# Altium PCB PCB.PcbDoc
Units mm, origin at the board's own origin, x right, y up, seen from the top; angles counter-clockwise.
Board outline 44.5 x 25.75 mm, 2 copper layers (Top Layer, Bottom Layer); 25 components, 19 nets, 79 pads, 10 vias.
Unrouted connection lines stored in the file: 2.
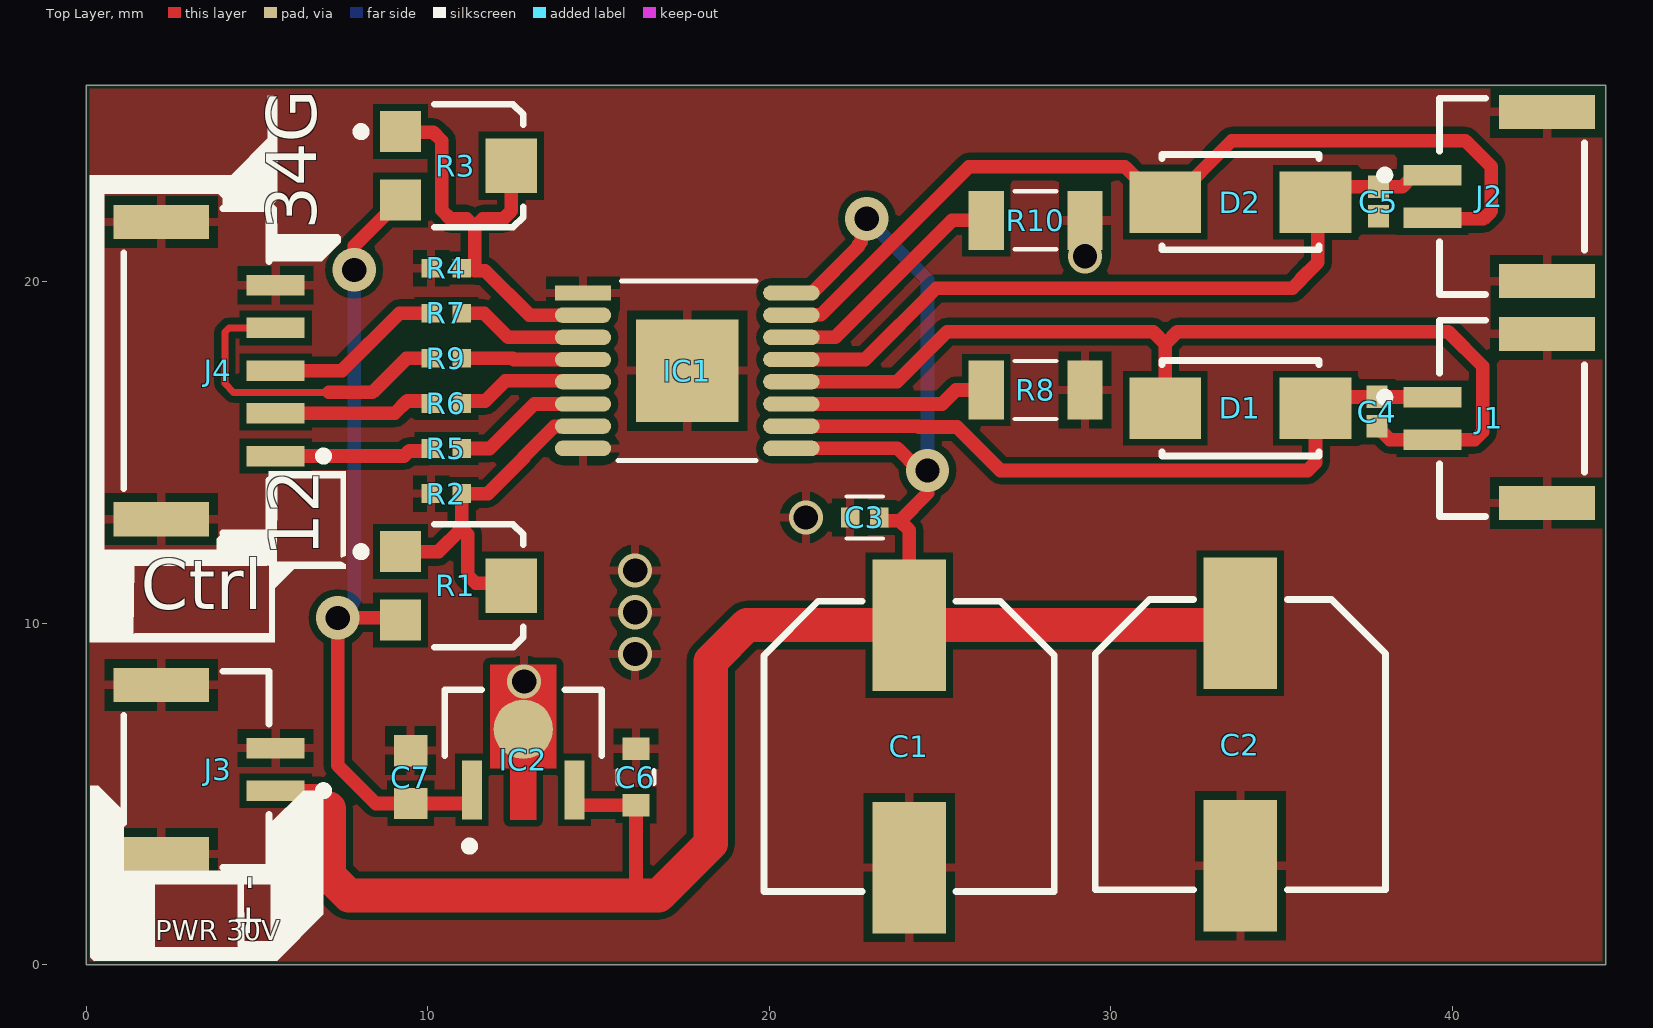
[diagram p0: Top Layer view]
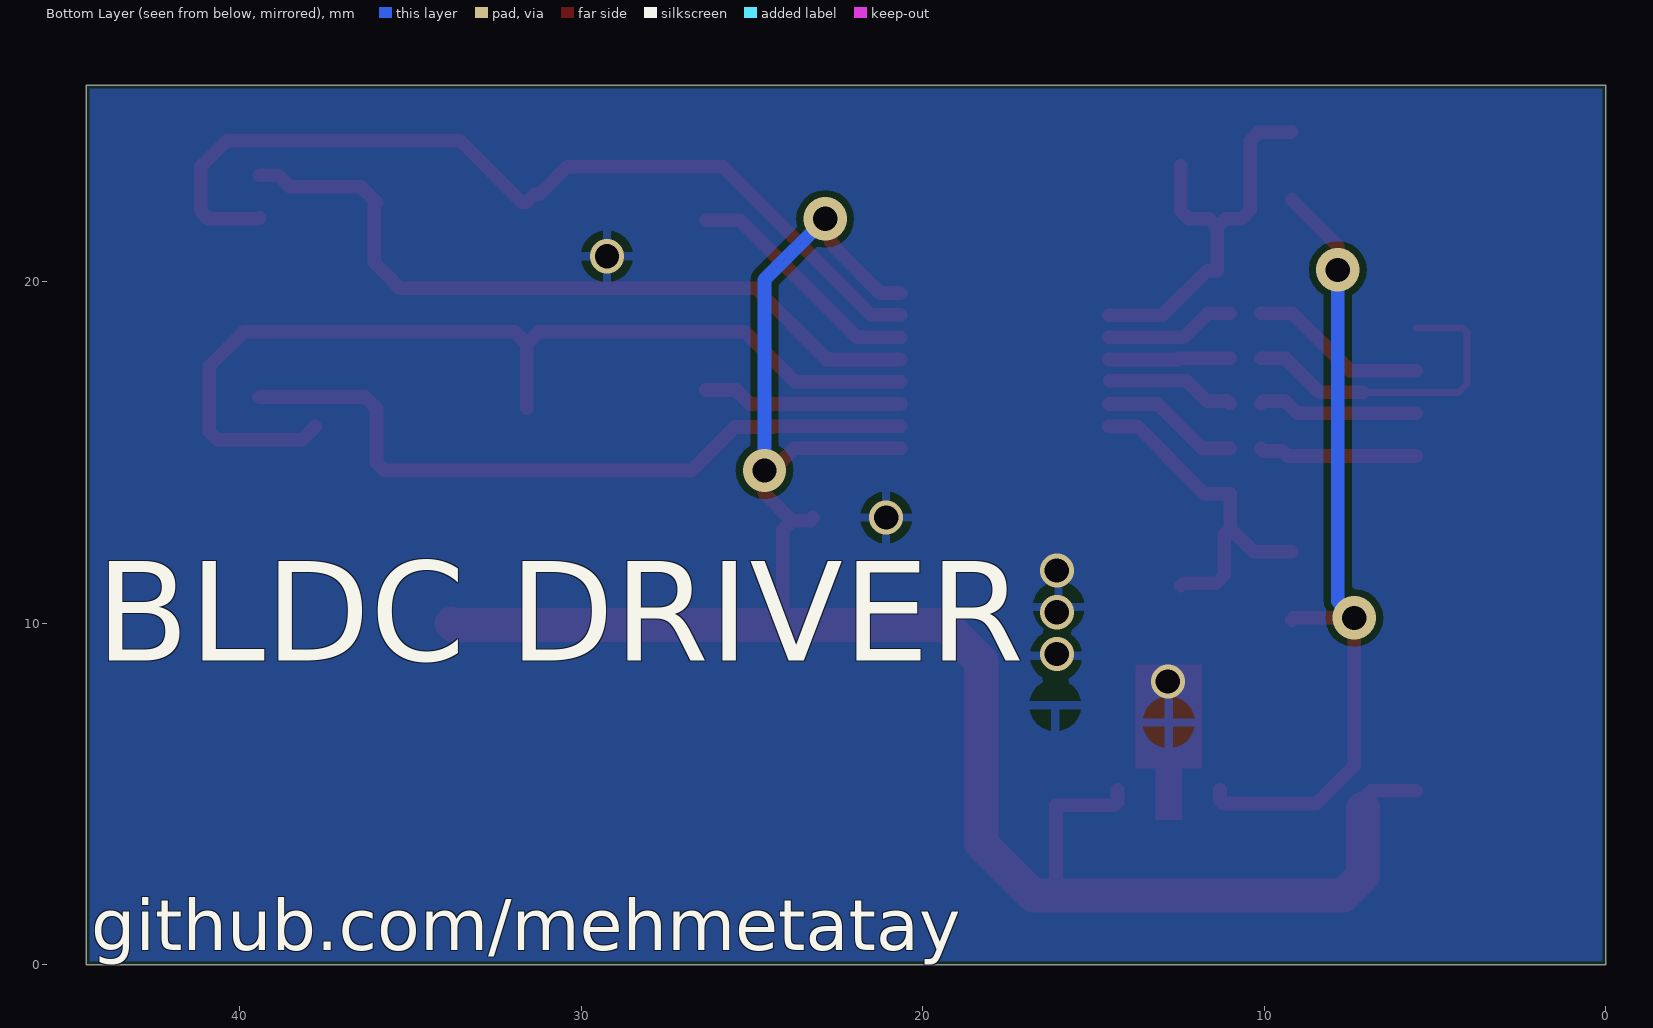
[diagram p1: Bottom Layer view, seen from below]
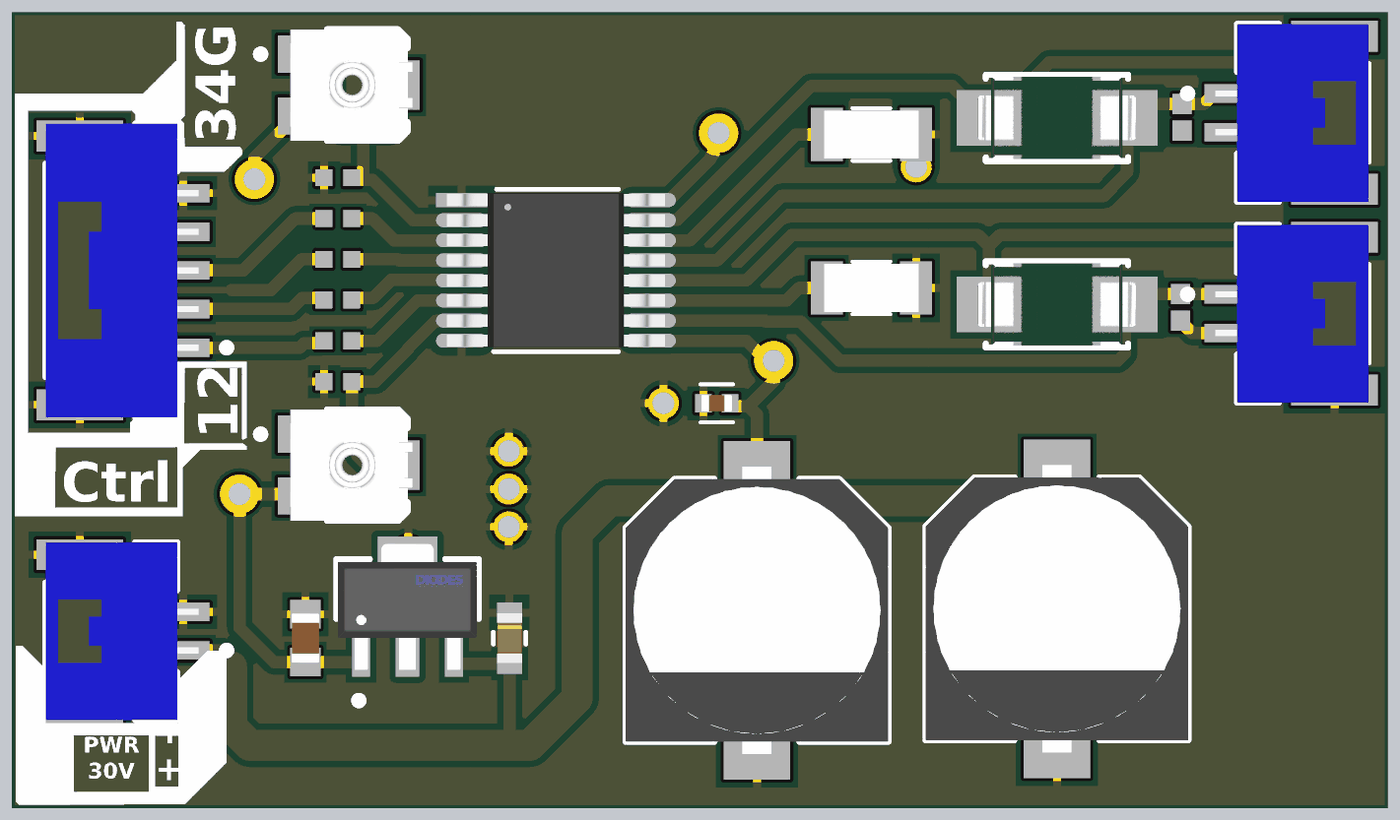
[diagram p2: 3D render of the assembled board from above, using the file's embedded part models]

## Layer stack, top to bottom
Top Solder: solder mask 0.0102, Solder Resist, Dk 3.5
Top Layer: signal copper 0.0356
Dielectric 1: dielectric 0.32, FR-4, Dk 4.8
Bottom Layer: signal copper 0.0356
Bottom Solder: solder mask 0.0102, Solder Resist, Dk 3.5

## Board outline
0,0 44.5,0 44.5,25.75 0,25.75

## Design rules (kind name [scope] priority, off if disabled: settings)
Clearance [All] p1: gap=0.2 ignorepadtopadclearanceinfootprint=FALSE except(0: Arc-Text Track-Text SMDPad-Text THPad-Text Via-Text Fill-Text Poly-Text Region-Text Text-Text Text-Hole)
MinimumSolderMaskSliver [All] p1: minsoldermaskwidth=0
PolygonConnect [All] p1: connectstyle=Relief reliefconductorwidth=0.254 reliefentries=4 polygonreliefangle="90 Angle" airgapwidth=0.254
RoutingVias [All] p1: holewidth=0.711 width=1.27 viastyle="Through Hole" minholewidth=0.711 minwidth=1.27 maxholewidth=0.711 maxwidth=1.27
SilkToSilkClearance [All] p1: silktosilkclearance=0
SilkToSolderMaskClearance [IsPad] p1: minsilkscreentomaskgap=0 clearancetoexposedcopper=TRUE
SolderMaskExpansion [All] p1: expansion=0.102 istentingtop=FALSE
Width [All] p1: maxlimit=2 minlimit=0.2 preferedwidth=0.4
27 further rules are at their usual default settings.

## Components (designator, comment, footprint, x,y, rotation, side; value= is the part's Value field where it differs from the comment)
C1 "100uF" NIC-UWT1H101MNL1GS_N 24.1,6.4 r270 top
C2 "100uF" NIC-UWT1H101MNL1GS_N 33.8,6.45 r270 top
C3 "220nF" CAPC1005X55N 22.8,13.1 r0 top
C4 "100nF" CAPC1005X60X30NL05T10 37.8,16.2 r90 top
C5 "100nF" CAPC1005X60X30NL05T10 37.846,22.352 r270 top
C6 "1uF" CAP_CL10_SAM 16.1,5.5 r270 top
C7 "2.2uF" CAPC1608X90N 9.5,5.5 r270 top
D1 "TVS Diode" FP-SMAJ-CA-MFG 33.8,16.3 r180 top
D2 "TVS Diode" FP-SMAJ-CA-MFG 33.8,22.333 r180 top
IC1 "Allegro A4954" TSSOP-16_ALM 17.6,17.4 r0 top
IC2 "3.3V Linear Reg" FP-SOT89-MFG 12.8,6.754 r0 top
J1 "2 Pin Header" JST-BM02B-GHS-TBT_V 41.1,16 r270 top
J2 "2 Pin Header" JST-BM02B-GHS-TBT_V 41.1,22.5 r270 top
J3 "2 Pin Header" JST-BM02B-GHS-TBT_V 3.875,5.725 r90 top
J4 "5 Pin Header" JST-BM05B-GHS-TBT_V 3.875,17.4 r90 top
R1 "10kR" BOUR-TC33X-2_V 11,11.1 r0 top
R2 "750R" RESC1005X40X25NL05T05 10.55,13.8 r0 top
R3 "10kR" BOUR-TC33X-2_V 11,23.4 r0 top
R4 "750R" RESC1005X40X25NL05T05 10.55,20.4 r0 top
R5 "33R" RESC1005X40X25NL05T05 10.55,15.12 r0 top
R6 "33R" RESC1005X40X25NL05T05 10.55,16.44 r0 top
R7 "33R" RESC1005X40X25NL05T05 10.55,19.08 r0 top
R8 "250mR" RESC3015X65N 27.8,16.833 r0 top
R9 "33R" RESC1005X40X25NL05T05 10.55,17.76 r0 top
R10 "250mR" RESC3015X65N 27.8,21.8 r0 top

## Footprints (in the part's own frame and the unit in brackets; to place one, negate y for a bottom-side part, rotate by r counter-clockwise, add the part's x,y. Pads: shape width x height; smd on the part's side, far side on the other; paste and mask are expansions set on the pad)
BOUR-TC33X-2_V [mm] "SMD, 3-Leads, Body 3.8x3.6mm"
  rect 1.2x1.2 smd: 1(-1.8,1) 3(-1.8,-1)
  rect 1.5x1.6 smd: 2(1.45,0)
  silkscreen extent -3.07,-1.8 1.8,1.8, body extent -2,-1.8 1.96,1.8, height 1.15
CAP_CL10_SAM [mm]
  rect 0.656x0.8 smd paste+0 mask+0: 1(-0.828,0) 2(0.828,0)
  silkscreen extent -0.19,-0.53 0.19,0.53, body extent -0.8,-0.4 0.8,0.4, height 0.9
CAPC1005X55N [mm]
  rect 0.54x0.6 smd: 1(-0.43,0) 2(0.43,0)
  silkscreen extent -0.53,-0.62 0.53,0.62, body extent -0.5,-0.27 0.5,0.28, height 0.48
CAPC1005X60X30NL05T10 [mm] "Chip Capacitor, 2-Leads, Body 1.00x0.50mm, IPC Medium Density"
  rect 0.66x0.62 smd: 1(-0.43,0) 2(0.43,0)
  body extent -0.53,-0.28 0.53,0.27, height 0.6
CAPC1608X90N [mm]
  rect 0.92x0.98 smd: 1(-0.775,0) 2(0.775,0)
  body extent -0.8,-0.45 0.8,0.45, height 0.78
FP-SMAJ-CA-MFG [mm]
  rect 2.1x1.8 smd paste+0 mask+0: 1(-2.2,0) 2(2.2,0)
  silkscreen extent -2.3,-1.4 2.3,1.4, body extent -3.35,-1.5 3.35,1.5, height 0.25
FP-SOT89-MFG [mm]
  rect 0.58x1.73 smd paste+0 mask+0: 1(-1.5,-1.635) 3(1.5,-1.635)
  round 1.74 smd paste+0 mask+0: 2(0,0.146)
  Top Layer region: -0.38,-2.5 -0.38,-1 -0.967,-1 -0.967,2.03 0.967,2.03 0.967,-1 0.38,-1 0.38,-2.5
  silkscreen extent -2.3,-3.4 2.3,1.3, body extent -2.4,-2.6 2.4,2.13, height 0.25
JST-BM02B-GHS-TBT_V [mm] "Connector, 2-Leads, Body 5.75x4.25mm, Pitch 1.25mm"
  rect 0.6x1.7 smd: 1(-0.625,-1.675) 2(0.625,-1.675)
  rect 1x2.8 smd: MP1(-2.475,1.675) MP2(2.475,1.675)
  silkscreen extent -2.88,-3.2 2.88,2.78, body extent -2.88,-2.17 2.87,2.78, height 4.21
JST-BM05B-GHS-TBT_V [mm] "Connector, 5-Leads, Body 9.5x4.25mm, Pitch 1.25mm"
  rect 0.6x1.7 smd: 1(-2.5,-1.675) 2(-1.25,-1.675) 3(0,-1.675) 4(1.25,-1.675) 5(2.5,-1.675)
  rect 1x2.8 smd: MP1(-4.35,1.675) MP2(4.35,1.675)
  silkscreen extent -4.75,-3.2 4.75,2.78, body extent -4.75,-2.17 4.75,2.78, height 4.2
NIC-UWT1H101MNL1GS_N [mm] "Aluminum Electrolytic Capacitor, Body 8.5x8.5mm, IPC Medium Density"
  rect 3.85x2.15 smd: 1(-3.55,0) 2(3.55,0)
  silkscreen extent -4.25,-4.25 4.25,4.25, body extent -4.65,-4.25 4.65,4.25, height 10.8
RESC1005X40X25NL05T05 [mm] "Chip Resistor, 2-Leads, Body 1.00x0.50mm, IPC Medium Density"
  rect 0.55x0.55 smd: 1(-0.45,0) 2(0.45,0)
  body extent -0.53,-0.27 0.53,0.28, height 0.4
RESC3015X65N [mm]
  rect 1.03x1.72 smd: 1(-1.445,0) 2(1.445,0)
  silkscreen extent -0.61,-0.85 0.61,0.85, body extent -1.53,-0.77 1.53,0.77, height 0.65
TSSOP-16_ALM [mm]
  rect 1.65x0.45 smd paste+0 mask+0: 1(-3.05,2.275)
  oval 1.65x0.45 smd paste+0 mask+0: 2(-3.05,1.625) 3(-3.05,0.975) 4(-3.05,0.325) 5(-3.05,-0.325) 6(-3.05,-0.975) 7(-3.05,-1.625) 8(-3.05,-2.275) 9(3.05,-2.275) 10(3.05,-1.625) 11(3.05,-0.975) 12(3.05,-0.325) 13(3.05,0.325) 14(3.05,0.975) 15(3.05,1.625) 16(3.05,2.275)
  rect 3x3 smd paste-1.487 mask+0: 17(0,0)
  silkscreen extent -2.02,-2.63 2.02,2.63, body extent -3.52,-2.5 3.53,2.5, height 1.2

## Part data
C1 C2: "100uF 50 V dc Aluminium Electrolytic Capacitor; WT Series 1000h 8 (Dia.) x 10mm", Case/Package=Radial, Dielectric Material=Aluminium, Leakage Current=3uA, Manufacturer=Nichicon, Manufacturer Part Number=UWT1H101MNL1GS, Max Operating Temperature=105°C, Min Operating Temperature=-55°C, Package Quantity=500, Ripple Current=140mA, Supplier Part Number 1=493-2226-1-ND, Tolerance=20%, Voltage=50V, Capacitance=100uF, Category="Aluminum Electrolytic Capacitors", ComponentLink1Description=https://datasheet.ciiva.com/97/e-wt-97104.pdf?src-supplier=Digi-Key, ComponentLink1URL=https://datasheet.ciiva.com/97/e-wt-97104.pdf?src-supplier=Digi-Key, ComponentLink2Description=https://datasheet.ciiva.com/97/e-wt-97105.pdf?src-supplier=Digi-Key, ComponentLink2URL=https://datasheet.ciiva.com/97/e-wt-97105.pdf?src-supplier=Digi-Key, ComponentLink3Description=https://datasheet.ciiva.com/97/e-wt-97106.pdf?src-supplier=Digi-Key, ComponentLink3URL=https://datasheet.ciiva.com/97/e-wt-97106.pdf?src-supplier=Digi-Key, ComponentLink4Description=https://datasheet.ciiva.com/11776/0900766b80fa3a91-11776930.pdf?src-supplier=RSComponents, ComponentLink4URL=https://datasheet.ciiva.com/11776/0900766b80fa3a91-11776930.pdf?src-supplier=RSComponents, ComponentLink5Description=https://datasheet.ciiva.com/5362/e-wt-30307-5362773.pdf?src-supplier=Mouser, ComponentLink5URL=https://datasheet.ciiva.com/5362/e-wt-30307-5362773.pdf?src-supplier=Mouser, ComponentLink6Description=https://datasheet.ciiva.com/11686/e-wt-11686889.pdf?src-supplier=Avnet, ComponentLink6URL=https://datasheet.ciiva.com/11686/e-wt-11686889.pdf?src-supplier=Avnet, ComponentLink7Description=https://datasheet.ciiva.com/28458/1910938-28458459.pdf?src-supplier=Element14, ComponentLink7URL=https://datasheet.ciiva.com/28458/1910938-28458459.pdf?src-supplier=Element14, ComponentLink8Description=https://datasheet.ciiva.com/16502/e-wt-16502940.pdf?src-supplier=Future+Electronics, ComponentLink8URL=https://datasheet.ciiva.com/16502/e-wt-16502940.pdf?src-supplier=Future+Electronics, ComponentLink9Description=https://datasheet.ciiva.com/7781/e-wt-7781807.pdf?src-supplier=Element14, ComponentLink9URL=https://datasheet.ciiva.com/7781/e-wt-7781807.pdf?src-supplier=Element14, ComponentLink10Description=https://datasheet.ciiva.com/17527/e-wt-17527183.pdf?src-supplier=Avnet+Europe, ComponentLink10URL=https://datasheet.ciiva.com/17527/e-wt-17527183.pdf?src-supplier=Avnet+Europe, Diameter=8mm, Dissipation Factor=0.14%, Height=10mm, Height - Seated (Max)=0.413inch, Lead Free="Lead Free", Length=10mm, Life (Hours)=1000Hour, Mount="Surface Mount", Number of Pins=2, Packaging="Tape and Reel", Pricing 1="1=0,44000, 10=0,31400, 50=0,23720, 100=0,20660 (USD)", Radiation Hardening=No, REACH SVHC="No SVHC", Ripple Current (AC)=140mA, RoHS=Yes, Stock 1=103638, Supplier 1=Digi-Key, Termination=SMD/SMT, Voltage Rating=50V, Voltage Rating (DC)=50V
C3: "TAIYO YUDEN - UMK105BJ224KV-F - CAPACITOR, MLCC, X5R, 0.22UF, 50V, 0402, FULL REEL", Case Code (Metric)=1005, Case Code (Imperial)=0402, Dielectric=X5R, Manufacturer="Taiyo Yuden", Manufacturer Part Number=UMK105BJ224KV-F, Max Operating Temperature=85°C, Min Operating Temperature=-55°C, Package Quantity=10000, Supplier Part Number 1=587-3500-1-ND, Tolerance=10%, Voltage Rating=50V, Capacitance=220nF, Case/Package=0402, Category="Ceramic Capacitors", ComponentLink1Description=https://datasheet.ciiva.com/30112/713umk105bj224kv-f-30112478.pdf?src-supplier=Onlinecomponents.com, ComponentLink1URL=https://datasheet.ciiva.com/30112/713umk105bj224kv-f-30112478.pdf?src-supplier=Onlinecomponents.com, ComponentLink2Description=https://datasheet.ciiva.com/24495/460umk105bj224kv-f-24495779.pdf?src-supplier=Onlinecomponents.com, ComponentLink2URL=https://datasheet.ciiva.com/24495/460umk105bj224kv-f-24495779.pdf?src-supplier=Onlinecomponents.com, ComponentLink3Description=https://datasheet.ciiva.com/18697/mlcc-all-e-18697509.pdf?src-supplier=Digi-Key, ComponentLink3URL=https://datasheet.ciiva.com/18697/mlcc-all-e-18697509.pdf?src-supplier=Digi-Key, Halogen Free="Halogen Free", Height=0.5mm, Lead Free="Lead Free", Length=0.039inch, Mount="Surface Mount", Packaging="Tape and Reel", Pricing 1="1=0,21000, 10=0,14400, 50=0,08660, 100=0,07320, 500=0,05006, 1000=0,04428, 2500=0,04235, 5000=0,03850 (USD)", RoHS=Yes, Stock 1=285982, Supplier 1=Digi-Key, Termination=SMD/SMT, Thickness=0.022inch, Voltage Rating (DC)=50V, Width=0.02inch
C4 C5: "Capacitor 100 nF 10 VDC 0402", Case Code (Metric)=1005, Case Code (Imperial)=0402, Dielectric=X5R, Dielectric Material=Ceramic, Manufacturer=KEMET, Manufacturer Part Number=C0402C104K8PACTU, Max Operating Temperature=85°C, Min Operating Temperature=-55°C, Package Quantity=1, Supplier Part Number 1=399-3027-1-ND, Tolerance=10%, Voltage=10V, Capacitance=100nF, Case/Package=0402, Category="Ceramic Capacitors", ComponentLink1Description=https://datasheet.ciiva.com/7747/1776086-7747440.pdf?src-supplier=Element14, ComponentLink1URL=https://datasheet.ciiva.com/7747/1776086-7747440.pdf?src-supplier=Element14, ComponentLink2Description=https://datasheet.ciiva.com/144/docfinderpartnumber-c0402c104k8pactu-144097.pdf?src-supplier=Digi-Key, ComponentLink2URL=https://datasheet.ciiva.com/144/docfinderpartnumber-c0402c104k8pactu-144097.pdf?src-supplier=Digi-Key, ComponentLink3Description=https://datasheet.ciiva.com/14595/70095383-14595064.pdf?src-supplier=Allied+Electronics, ComponentLink3URL=https://datasheet.ciiva.com/14595/70095383-14595064.pdf?src-supplier=Allied+Electronics, ComponentLink4Description=https://datasheet.ciiva.com/14588/70095383-14588187.pdf?src-supplier=Allied+Electronics, ComponentLink4URL=https://datasheet.ciiva.com/14588/70095383-14588187.pdf?src-supplier=Allied+Electronics, ComponentLink5Description=https://datasheet.ciiva.com/28645/1789732-28645387.pdf?src-supplier=Element14, ComponentLink5URL=https://datasheet.ciiva.com/28645/1789732-28645387.pdf?src-supplier=Element14, Contact Plating=Tin,Matte, Depth=0.5mm, Dissipation Factor=5%, Height=0.5mm, Lead Free="Lead Free", Lead Pitch=0.3mm, Length=1mm, Mount="Surface Mount,PCB", Number of Pins=2, Packaging="Tape and Reel", Pricing 1="1=0,10000, 10=0,04000, 50=0,02180, 100=0,01780, 500=0,01270, 1000=0,00998, 2500=0,00908, 5000=0,00835 (USD)", Radiation Hardening=No, REACH SVHC="No SVHC", RoHS=Yes, Stock 1=907324, Supplier 1=Digi-Key, Termination=SMD/SMT, Thickness=0.022inch, Voltage Rating=10V, Voltage Rating (DC)=10V, Width=0.02inch
C6: "Cap Ceramic 1uF 50V X5R 10% SMD 0603 85C Cardboard T/R", Case Code (Metric)=1608, Case Code (Imperial)=0603, Dielectric=X5R, Manufacturer=Samsung, Manufacturer Part Number=CL10A105KB8NNNC, Max Operating Temperature=85°C, Min Operating Temperature=-55°C, Package Quantity=1, Supplier Part Number 1=1276-1860-1-ND, Tolerance=10%, Voltage Rating=50V, Capacitance=1uF, Case/Package=0603, Category="Ceramic Capacitors", ComponentLink1Description=https://datasheet.ciiva.com/26877/getdatasheetpartid-753736-26877879.pdf?src-supplier=Verical, ComponentLink1URL=https://datasheet.ciiva.com/26877/getdatasheetpartid-753736-26877879.pdf?src-supplier=Verical, Contact Plating=Tin, Depth=0.8mm, Length=1.6mm, Mount="Surface Mount", Packaging="Tape and Reel", Pricing 1="1=0,15000, 10=0,10500, 50=0,05960, 100=0,04940, 500=0,03462, 1000=0,02866 (USD)", Radiation Hardening=No, RoHS=Yes, Stock 1=1724919, Supplier 1=Digi-Key, Termination=Wraparound, Thickness=0.035inch, Width=0.031inch
C7: "SAMSUNG ELECTRO-MECHANICS - CL10A225KP8NNNC - SMD Multilayer Ceramic Capacitor, 2.2 µF, 10 V, 0603 [1608 Metric], ± 10%, X5R, CL Series", Case Code (Metric)=1608, Case Code (Imperial)=0603, Dielectric=X5R, Manufacturer=Samsung, Manufacturer Part Number=CL10A225KP8NNNC, Max Operating Temperature=85°C, Min Operating Temperature=-55°C, Package Quantity=1, Supplier Part Number 1=1276-1085-1-ND, Tolerance=10%, Voltage=10V, Capacitance=2.2uF, Case/Package=0603, Category="Ceramic Capacitors", ComponentLink1Description=https://datasheet.ciiva.com/25799/cl10a225kp8nnnc-25799697.pdf?src-supplier=Digi-Key, ComponentLink1URL=https://datasheet.ciiva.com/25799/cl10a225kp8nnnc-25799697.pdf?src-supplier=Digi-Key, ComponentLink2Description=https://datasheet.ciiva.com/26838/getdatasheetpartid-358617-26838359.pdf?src-supplier=Verical, ComponentLink2URL=https://datasheet.ciiva.com/26838/getdatasheetpartid-358617-26838359.pdf?src-supplier=Verical, ComponentLink3Description=https://datasheet.ciiva.com/29198/457945-da-01-en-vs-kondensator-0603-29198592.pdf?src-supplier=Conrad, ComponentLink3URL=https://datasheet.ciiva.com/29198/457945-da-01-en-vs-kondensator-0603-29198592.pdf?src-supplier=Conrad, Depth=0.8mm, Height=0.8mm, Lead Free="Lead Free", Length=1.6mm, Material=Ceramic, Mount="Surface Mount", Packaging="Tape and Reel", Pricing 1="1=0,10000, 10=0,05600, 50=0,03040, 100=0,02490, 500=0,01778, 1000=0,01398 (USD)", Radiation Hardening=No, RoHS=Yes, Stock 1=840059, Supplier 1=Digi-Key, Thickness=0.035inch, Voltage Rating=10V, Voltage Rating (DC)=10V, Width=0.031inch
D1 D2: "LITTELFUSE - SMAJ36CA - TVS Diode, SMAJ Series, Bidirectional, 36 V, 58.1 V, DO-214AC (SMA), 2 Pins", Breakdown Voltage=40V, Clamping Voltage=58.1V, Leakage Current=1uA, Manufacturer=Littelfuse, Manufacturer Part Number=SMAJ36CA, Max Breakdown Voltage=44.2V, Max Operating Temperature=150°C, Max Power Dissipation=3.3W, Max Surge Current=6.9A, Min Operating Temperature=-55°C, Operating Supply Voltage=36V, Package Quantity=5000, Peak Pulse Power=400W, Power Line Protection=No, Resistor Type=Zener, Supplier Part Number 1=SMAJ36CALFCT-ND, Test Current=1mA, Category="TVS Diodes", ComponentLink1Description=https://datasheet.ciiva.com/331/littelfuse-tvs-diode-smaj-datasheet-pdf-331060.pdf?src-supplier=Digi-Key, ComponentLink1URL=https://datasheet.ciiva.com/331/littelfuse-tvs-diode-smaj-datasheet-pdf-331060.pdf?src-supplier=Digi-Key, ComponentLink2Description=https://datasheet.ciiva.com/331/littelfuse-tvs-diode-smaj-datasheet-pdf-331061.pdf?src-supplier=Digi-Key, ComponentLink2URL=https://datasheet.ciiva.com/331/littelfuse-tvs-diode-smaj-datasheet-pdf-331061.pdf?src-supplier=Digi-Key, ComponentLink3Description=https://datasheet.ciiva.com/331/littelfuse-tvs-diode-smaj-datasheet-pdf-331062.pdf?src-supplier=Digi-Key, ComponentLink3URL=https://datasheet.ciiva.com/331/littelfuse-tvs-diode-smaj-datasheet-pdf-331062.pdf?src-supplier=Digi-Key, ComponentLink4Description=https://datasheet.ciiva.com/16487/littelfuse-tvs-diode-smaj-16487439.pdf?src-supplier=Future+Electronics, ComponentLink4URL=https://datasheet.ciiva.com/16487/littelfuse-tvs-diode-smaj-16487439.pdf?src-supplier=Future+Electronics, Direction=Bidirectional, Height=2.29mm, Lead Free="Lead Free", Length=5.28mm, Min Breakdown Voltage=40V, Mount="Surface Mount", Number of Bidirectional Channels=1, Number of Channels=1, Number of Elements=1, Number of Pins=2, Packaging="Tape and Reel", Peak Pulse Current=6.9A, Polarity=Bidirectional, Power Dissipation=400W, Pricing 1="1=0,41000, 10=0,27500, 100=0,15750, 500=0,11000, 1000=0,08750, 2000=0,08500 (USD)", REACH SVHC="No SVHC", Reverse Breakdown Voltage=40V, Reverse Standoff Voltage=36V, RoHS=Yes, Stock 1=7566, Supplier 1=Digi-Key, Termination=SMD/SMT, Voltage Rating (DC)=36V, Width=2.79mm
IC1: "IC MOTOR DRIVER PAR 16TSSOP", Case/Package=TSSOP, Manufacturer="Allegro MicroSystems", Manufacturer Part Number=A4954ELPTR-T, Max Operating Temperature=85°C, Max Supply Voltage=40V, Min Operating Temperature=-40°C, Min Supply Voltage=8V, Output Current=1.5A, Package Quantity=1, Supplier Part Number 1=620-1384-1-ND, Category="Motor Drivers", ComponentLink1Description=https://datasheet.ciiva.com/8199/a4954-datasheet-8199653.pdf?src-supplier=Avnet, ComponentLink1URL=https://datasheet.ciiva.com/8199/a4954-datasheet-8199653.pdf?src-supplier=Avnet, ComponentLink2Description=https://datasheet.ciiva.com/17233/a4954-datasheet-17233770.pdf?src-supplier=Avnet+Europe, ComponentLink2URL=https://datasheet.ciiva.com/17233/a4954-datasheet-17233770.pdf?src-supplier=Avnet+Europe, Lead Free="Lead Free", Mount="Surface Mount", Number Of Outputs=2, Packaging="Tape and Reel", Pricing 1="1=2,76000, 10=2,47500, 25=2,34000, 100=1,92400, 250=1,72640, 500=1,66400, 1000=1,38320 (USD)", RoHS=Yes, Stock 1=14132, Supplier 1=Digi-Key
IC2: "IC REG LINEAR 3.3V 150MA SOT89", Case/Package=SOT-89, Dropout Voltage=1V, Manufacturer=Diodes, Manufacturer Part Number=AP7381-33Y-13, Max Operating Temperature=125°C, Max Supply Current=25uA, Max Input Voltage=40V, Min Operating Temperature=-40°C, Min Output Voltage=3.3V, Output Current=150mA, Quiescent Current=2.5uA, Supplier Part Number 1=621-AP7381-33Y-13, Category="Voltage Regulators - Linear", ComponentLink1Description=https://www.diodes.com/assets/Datasheets/AP7381.pdf?src-supplier=Digi-Key, ComponentLink1URL=https://www.diodes.com/assets/Datasheets/AP7381.pdf?src-supplier=Digi-Key, Mount="Surface Mount", Number of Regulators=1, Output Configuration=Positive, Output Type=Fixed, Packaging="Tape and Reel", Pricing 1="1=0,44000, 10=0,29700, 100=0,14100, 1000=0,10800, 2500=0,09100, 10000=0,08300 (USD)", RoHS=No, Stock 1=86570, Supplier 1=Mouser
J1 J2 J3: "CONN HEADER SMD 2POS 1.25MM", Color=Natural, Manufacturer=JST, Manufacturer Part Number=BM02B-GHS-TBT(LF)(SN)(N), Supplier Part Number 1=455-1578-1-ND, Category=Connectors, ComponentLink1Description=http://www.jst-mfg.com/product/pdf/eng/eGH.pdf?src-supplier=Digi-Key, ComponentLink1URL=http://www.jst-mfg.com/product/pdf/eng/eGH.pdf?src-supplier=Digi-Key, Connector Type="Outer Shroud Contact", Contact Plating=Tin, Fastening Type=Ramp, Lead Free="Lead Free", Mount="Surface Mount", Number Of Positions=2, Number Of Rows=1, Packaging="Tape and Reel", Pitch=0.049inch, Pricing 1="1=0,39000, 10=0,36800, 100=0,25760, 500=0,22076, 1000=0,18397 (USD)", RoHS=Yes, Stock 1=188, Supplier 1=Digi-Key, Termination=Solder
R1 R3: "Res Trimmer 10K Ohm 25% 1/10W 1(Elec)/1(Mech)Turn (3 X 3.8mm) Foot Print SMD Embossed T/R", Color=Silver, Manufacturer=Bourns, Manufacturer Part Number=TC33X-2-103E, Max Operating Temperature=100°C, Max Power Dissipation=100mW, Min Operating Temperature=-40°C, Package Quantity=2500, Resistor Type=Cermet,Potentiometer, Supplier Part Number 1=TC33X-103ECT-ND, Temperature Coefficient=250ppm/°C, Tolerance=25%, Voltage Rating (DC)=50V, Category="Variable Resistors and Potentiometers", ComponentLink1Description=https://datasheet.ciiva.com/11830/0900766b802749b3-11830705.pdf?src-supplier=RSComponents, ComponentLink1URL=https://datasheet.ciiva.com/11830/0900766b802749b3-11830705.pdf?src-supplier=RSComponents, ComponentLink2Description=https://datasheet.ciiva.com/7953/1818686-7953349.pdf?src-supplier=Element14, ComponentLink2URL=https://datasheet.ciiva.com/7953/1818686-7953349.pdf?src-supplier=Element14, ComponentLink3Description=https://datasheet.ciiva.com/26944/getdatasheetpartid-183773-26944166.pdf?src-supplier=Verical, ComponentLink3URL=https://datasheet.ciiva.com/26944/getdatasheetpartid-183773-26944166.pdf?src-supplier=Verical, ComponentLink4Description=https://datasheet.ciiva.com/2155/tc33-2155962.pdf?src-supplier=Digi-Key, ComponentLink4URL=https://datasheet.ciiva.com/2155/tc33-2155962.pdf?src-supplier=Digi-Key, ComponentLink5Description=https://datasheet.ciiva.com/2155/tc33-2155963.pdf?src-supplier=Digi-Key, ComponentLink5URL=https://datasheet.ciiva.com/2155/tc33-2155963.pdf?src-supplier=Digi-Key, ComponentLink6Description=https://datasheet.ciiva.com/2155/tc33-2155964.pdf?src-supplier=Digi-Key, ComponentLink6URL=https://datasheet.ciiva.com/2155/tc33-2155964.pdf?src-supplier=Digi-Key, ComponentLink7Description=https://datasheet.ciiva.com/8089/tc33-8089484.pdf?src-supplier=Avnet, ComponentLink7URL=https://datasheet.ciiva.com/8089/tc33-8089484.pdf?src-supplier=Avnet, ComponentLink8Description=https://datasheet.ciiva.com/28659/1520225-28659212.pdf?src-supplier=Element14, ComponentLink8URL=https://datasheet.ciiva.com/28659/1520225-28659212.pdf?src-supplier=Element14, ComponentLink9Description=https://datasheet.ciiva.com/16802/tc33-16802397.pdf?src-supplier=Avnet+Europe, ComponentLink9URL=https://datasheet.ciiva.com/16802/tc33-16802397.pdf?src-supplier=Avnet+Europe, Contact Plating=Copper,Tin,Silver, Depth=3.8mm, Height=0.047inch, Lead Free="Lead Free", Length=3mm, Military Standard=Not, Mount="Surface Mount", Number of Turns=1, Packaging="Tape and Reel", Power Rating=100mW, Pricing 1="1=0,26000, 10=0,25200, 25=0,22760, 50=0,21700, 100=0,21000, 250=0,19600, 500=0,17850, 1000=0,16100 (USD)", Radiation Hardening=No, REACH SVHC="No SVHC", Resistance=10kR, RoHS=Yes, Stock 1=123264, Supplier 1=Digi-Key, Taper=Linear, Termination="Foot Print", Weight=29.4mg, Width=0.118inch
R2 R4: "PANASONIC - ERJ2RKF7500X - SMD Chip Resistor, 0402 [1005 Metric], 750 ohm, ERJ2RK Series, 50 V, Thick Film, 100 mW", Case Code (Metric)=1005, Case Code (Imperial)=0402, Manufacturer=Panasonic, Manufacturer Part Number=ERJ2RKF7500X, Max Operating Temperature=155°C, Max Power Dissipation=100mW, Min Operating Temperature=-55°C, Package Quantity=10000, Resistor Type="Thick Film", Supplier Part Number 1=P750LCT-ND, Temperature Coefficient=100ppm/°C, Tolerance=1%, Voltage Rating=50V, Case/Package=0402, Category="Chip SMD Resistors", ComponentLink1Description=https://datasheet.ciiva.com/9180/aoa0000ce2-9180085.pdf?src-supplier=Avnet, ComponentLink1URL=https://datasheet.ciiva.com/9180/aoa0000ce2-9180085.pdf?src-supplier=Avnet, ComponentLink2Description=https://datasheet.ciiva.com/28676/1678782-28676646.pdf?src-supplier=Element14, ComponentLink2URL=https://datasheet.ciiva.com/28676/1678782-28676646.pdf?src-supplier=Element14, ComponentLink3Description=https://datasheet.ciiva.com/28565/1678782-28565079.pdf?src-supplier=Element14, ComponentLink3URL=https://datasheet.ciiva.com/28565/1678782-28565079.pdf?src-supplier=Element14, ComponentLink4Description=https://datasheet.ciiva.com/30202/aoa0000ce2-30202551.pdf?src-supplier=Onlinecomponents.com, ComponentLink4URL=https://datasheet.ciiva.com/30202/aoa0000ce2-30202551.pdf?src-supplier=Onlinecomponents.com, Contact Plating=Tin, Depth=0.5mm, Features="Automotive AEC-Q200", Height=0.35mm, Lead Free="Lead Free", Length=1mm, Military Standard=Not, Mount="Surface Mount", Number of Terminations=2, Packaging="Tape and Reel", Power Rating=100mW, Pricing 1="1=0,10000, 10=0,02200, 100=0,00890, 1000=0,00398, 2500=0,00345, 5000=0,00285 (USD)", REACH SVHC="No SVHC", Resistance=750R, RoHS=Yes, Stock 1=397750, Supplier 1=Digi-Key, Termination=SMD/SMT, Voltage Rating (DC)=50V, Width=0.02inch
R5 R6 R7 R9: "GLOVE, POLYAMIDE, L/FREE, PU, SIZE 6 - More Details", Case Code (Metric)=1005, Case Code (Imperial)=0402, Manufacturer=Panasonic, Manufacturer Part Number=ERJ-2GEJ330X, Max Operating Temperature=155°C, Max Power Dissipation=100mW, Min Operating Temperature=-55°C, Package Quantity=1, Resistor Type="Thick Film", Supplier Part Number 1=P33JCT-ND, Temperature Coefficient=200ppm/°C, Tolerance=5%, Voltage Rating=50V, Case/Package=0402, Category="Chip SMD Resistors", ComponentLink1Description=https://datasheet.ciiva.com/39121/1986916-39121637.pdf?src-supplier=Jameco, ComponentLink1URL=https://datasheet.ciiva.com/39121/1986916-39121637.pdf?src-supplier=Jameco, ComponentLink2Description=https://datasheet.ciiva.com/11821/0900766b80f806dd-11821291.pdf?src-supplier=RSComponents, ComponentLink2URL=https://datasheet.ciiva.com/11821/0900766b80f806dd-11821291.pdf?src-supplier=RSComponents, ComponentLink3Description=https://datasheet.ciiva.com/43460/1500035-43460357.pdf?src-supplier=Farnell, ComponentLink3URL=https://datasheet.ciiva.com/43460/1500035-43460357.pdf?src-supplier=Farnell, ComponentLink4Description=https://datasheet.ciiva.com/46374/1500035-46374021.pdf?src-supplier=Element14, ComponentLink4URL=https://datasheet.ciiva.com/46374/1500035-46374021.pdf?src-supplier=Element14, ComponentLink5Description=https://datasheet.ciiva.com/16522/aoa0000ce1-16522983.pdf?src-supplier=Avnet+Asia, ComponentLink5URL=https://datasheet.ciiva.com/16522/aoa0000ce1-16522983.pdf?src-supplier=Avnet+Asia, ComponentLink6Description=https://datasheet.ciiva.com/9190/aoa0000ce1-9190504.pdf?src-supplier=Avnet, ComponentLink6URL=https://datasheet.ciiva.com/9190/aoa0000ce1-9190504.pdf?src-supplier=Avnet, ComponentLink7Description=https://datasheet.ciiva.com/16784/70260739-16784442.pdf?src-supplier=Allied+Electronics, ComponentLink7URL=https://datasheet.ciiva.com/16784/70260739-16784442.pdf?src-supplier=Allied+Electronics, ComponentLink8Description=https://datasheet.ciiva.com/16449/aoa0000ce1-16449547.pdf?src-supplier=Future+Electronics, ComponentLink8URL=https://datasheet.ciiva.com/16449/aoa0000ce1-16449547.pdf?src-supplier=Future+Electronics, ComponentLink9Description=https://datasheet.ciiva.com/30205/4aoa0000ce1-30205131.pdf?src-supplier=Onlinecomponents.com, ComponentLink9URL=https://datasheet.ciiva.com/30205/4aoa0000ce1-30205131.pdf?src-supplier=Onlinecomponents.com, ComponentLink10Description=https://datasheet.ciiva.com/46386/1500035-46386748.pdf?src-supplier=Element14, ComponentLink10URL=https://datasheet.ciiva.com/46386/1500035-46386748.pdf?src-supplier=Element14, ComponentLink11Description=https://datasheet.ciiva.com/28547/1678796-28547165.pdf?src-supplier=Element14, ComponentLink11URL=https://datasheet.ciiva.com/28547/1678796-28547165.pdf?src-supplier=Element14, ComponentLink12Description=https://datasheet.ciiva.com/28686/1678796-28686909.pdf?src-supplier=Element14, ComponentLink12URL=https://datasheet.ciiva.com/28686/1678796-28686909.pdf?src-supplier=Element14, ComponentLink13Description=https://datasheet.ciiva.com/48530/aoa0000ce1-48530957.pdf?src-supplier=Avnet, ComponentLink13URL=https://datasheet.ciiva.com/48530/aoa0000ce1-48530957.pdf?src-supplier=Avnet, ComponentLink14Description=https://datasheet.ciiva.com/5917/1500035-5917807.pdf?src-supplier=Farnell, ComponentLink14URL=https://datasheet.ciiva.com/5917/1500035-5917807.pdf?src-supplier=Farnell, Contact Plating=Tin, Depth=0.5mm, Features="Automotive AEC-Q200", Height=0.35mm, Lead Free="Lead Free", Length=1mm, Military Standard=Not, Mount="Surface Mount", Number of Terminations=2, Packaging="Tape and Reel", Power Rating=100mW, Pricing 1="1=0,10000, 10=0,01900, 100=0,00770, 1000=0,00345, 2500=0,00299, 5000=0,00247 (USD)", Radiation Hardening=No, REACH SVHC="No SVHC", Resistance=33R, RoHS=Yes, Stock 1=1309957, Supplier 1=Digi-Key, Termination=SMD/SMT, Voltage Rating (DC)=50V, Width=0.02inch
R8 R10: "Res Thick Film 1206 250m Ohm 1% 1/2W 100ppm/C Molded SMD Paper T/R", Case Code (Metric)=3216, Case Code (Imperial)=1206, Manufacturer="Stackpole Electronics", Manufacturer Part Number=CSR1206FKR250, Max Operating Temperature=155°C, Max Power Dissipation=500mW, Min Operating Temperature=-55°C, Resistor Type="Thick Film", Supplier Part Number 1=CSR1206FKR250CT-ND, Temperature Coefficient=100ppm/°C, Tolerance=1%, Case/Package=1206, Category="Chip SMD Resistors", ComponentLink1Description=https://www.seielect.com/catalog/SEI-CSR_CSRN.pdf?src-supplier=Avnet+Asia, ComponentLink1URL=https://www.seielect.com/catalog/SEI-CSR_CSRN.pdf?src-supplier=Avnet+Asia, ComponentLink2Description=https://www.seielect.com/catalog/SEI-Packaging.pdf?src-supplier=Digi-Key, ComponentLink2URL=https://www.seielect.com/catalog/SEI-Packaging.pdf?src-supplier=Digi-Key, Contact Plating=Tin,Matte, Height=0.026inch, Lead Free="Lead Free", Length=0.12inch, Mount="Surface Mount", Number of Terminations=2, Packaging="Tape and Reel", Power Rating=500mW, Pricing 1="1=0,41000, 10=0,31100, 25=0,23640, 50=0,17560, 100=0,13050, 250=0,11024, 500=0,09450 (USD)", Resistance=250mR, RoHS=Yes, Stock 1=191422, Supplier 1=Digi-Key, Termination=Wraparound, Width=0.061inch

## Via types
v1: diameter 1, hole 0.711, Top Layer to Bottom Layer, 6 vias
v2: diameter 1.27, hole 0.711, Top Layer to Bottom Layer, 4 vias

## Nets (pads, with @x,y where several pads share a name; then routed paths per layer and width w, separated by ;. In a path a pad name is that pad's centre, name@x,y a point inside that pad or via, vN(x,y) a via of type N, cw(c..) or ccw(c..) an arc to the next point about the centre after c; other vN are vias at no path point)
3V3: C7.2 IC2.1 R1.3 R3.3 | length 23.9
  Top Layer w0.4: v2(7.85,20.35) 7.85,21.05 R3.3 ; R1.3 9.14,10.16 v2(7.366,10.16) 7.366,5.842 8.483,4.725 C7.2 11.21,4.725 11.3,4.815 IC2.1
  Bottom Layer w0.4: v2(7.366,10.16) 7.85,10.644 v2(7.85,20.35)
GND: C1.2 C2.2 C3.1 C6.1 C7.1 IC1.1 IC1.8 IC1.17 IC2.2 J1.MP1 J1.MP2 J2.MP1 J2.MP2 J3.2 J3.MP1 J3.MP2 J4.5 J4.MP1 J4.MP2 R2.1 R4.1 R8.2 R10.2
  other v1: 12.825,8.3 16.075,9.1 16.075,10.325 16.075,11.55 21.075,13.1 29.25,20.75
H1_IN1: J4.1 R5.1 | length 4.6
  Top Layer w0.4: J4.1 9.312,14.9 9.457,15.045 10.025,15.045 R5.1
H1_IN2: J4.2 R6.1 | length 4.7
  Top Layer w0.4: J4.2 9.038,16.15 9.398,16.51 10.03,16.51 R6.1
H1_IN3: J4.3 R7.1 | length 5.2
  Top Layer w0.4: J4.3 7.494,17.4 9.174,19.08 R7.1
H1_IN4: J4.4 R9.1 | length 9.6
  Top Layer w0.2: J4.4 4.181,18.65 4.064,18.533 4.064,17.018 4.318,16.764 7.112,16.764
  Top Layer w0.4: 7.112,16.764 8.382,16.764 9.378,17.76 R9.1
IN1: IC1.6 R5.2 | length 4.1
  Top Layer w0.4: R5.2 11.818,15.12 13.123,16.425 IC1.6
IN2: IC1.5 R6.2 | length 3.8
  Top Layer w0.4: R6.2 11.07,16.51 11.684,16.51 12.274,17.1 IC1.5@14.525,17.1
IN3: IC1.3 R7.2 | length 3.8
  Top Layer w0.4: R7.2 11.654,19.08 12.359,18.375 IC1.3
IN4: IC1.4 R9.2 | length 3.6
  Top Layer w0.4: R9.2 12.488,17.76 12.523,17.725 IC1.4
MOT_1A: C4.2 D1.1 IC1.10 J1.1 | length 21.1
  Top Layer w0.4: IC1.10 24.357,15.775 24.384,15.748 25.5,15.748 26.77,14.478 35.766,14.478 36,14.712 D1.1 36.33,16.63 C4.2 37.803,16.628 39.422,16.628 J1.1
MOT_1B: C4.1 D1.2 IC1.12 J1.2 | length 28.7
  Top Layer w0.4: IC1.12 23.746,17.075 25.213,18.542 31.242,18.542 31.6,18.184 ; D1.2 31.6,18.184 ; C4.1 37.8,15.75 38.175,15.375 J1.2 40.66,15.375 40.894,15.609 40.894,17.526 39.878,18.542 31.958,18.542 31.6,18.184
MOT_2A: C5.1 D2.1 IC1.13 J2.1 | length 22.2
  Top Layer w0.4: IC1.13 22.805,17.725 24.892,19.812 35.326,19.812 35.56,20.046 35.56,20.066 36.068,20.574 36.068,22.265 D2.1 36.449,22.782 C5.1 38.541,22.782 38.775,23.016 38.775,23.025 38.875,23.125 J2.1
MOT_2B: C5.2 D2.2 IC1.15 J2.2 | length 26.9
  Top Layer w0.4: IC1.15 20.66,19.035 21.514,19.035 25.848,23.368 30.415,23.368 31.216,22.568 31.366,22.568 D2.2 31.75,22.333 33.547,24.13 40.386,24.13 41.148,23.368 41.148,22.078 40.914,21.844 39.456,21.844 J2.2
NetR1_1: IC1.7 R1.1 R1.2 R2.2 | length 10.3
  Top Layer w0.4: R1.1 10.322,12.1 11,12.778 ; R1.2 12.374,11.176 11.41,11.176 11.176,11.41 11.176,12.602 11,12.778 ; IC1.7 14.54,15.765 13.707,15.765 12.822,14.881 12.822,14.854 11.768,13.8 R2.2 11,12.778
NetR3_1: IC1.2 R3.1 R3.2 R4.2 | length 12.1
  Top Layer w0.4: R3.1 9.216,24.384 10.16,24.384 10.414,24.13 10.414,22.098 10.668,21.844 11.143,21.844 11.377,21.61 ; R3.2 12.446,23.396 12.446,22.078 12.212,21.844 11.611,21.844 11.377,21.61 ; IC1.2 12.979,19.025 11.679,20.325 11.377,20.325 11.377,21.61
NetR8_1: IC1.11 R8.1 | length 5.9
  Top Layer w0.4: IC1.11 25.061,16.425 25.469,16.833 R8.1
NetR10_1: IC1.14 R10.1 | length 7.1
  Top Layer w0.4: IC1.14 21.931,18.375 25.356,21.8 R10.1
VCC: C1.1 C2.1 C3.2 C6.2 IC1.9 IC1.16 IC2.3 J3.1 | length 63.6
  Top Layer w0.4: J3.1 6.878,5.1 7.112,4.866 7.112,4.572 ; IC2.3 14.3,4.762 14.39,4.672 C6.2 16.1,2.188 16.256,2.032 ; IC1.9 23.756,15.125 24.403,14.478 v2(24.638,14.478) 24.638,13.808 23.83,13 ; IC1.16 21.25,19.675 22.606,21.031 22.606,21.082 22.694,21.17 22.694,21.678 v2(22.86,21.844) ; C3.2 23.23,13.07 23.3,13 23.83,13 ; C1.1 24.1,12.73 23.83,13
  Top Layer w1: 7.112,4.572 7.112,2.618 7.698,2.032 16.256,2.032 16.764,2.032 18.288,3.556 18.288,8.89 19.348,9.95 C1.1 33.75,9.95 C2.1
  Bottom Layer w0.4: v2(22.86,21.844) 24.638,20.066 v2(24.638,14.478)

## Polygon pours and split planes (outlines as drawn)
no net on Top Overlay "NONET_L02_P-001" (solid): 5.35,22.15 5.475,22.275 5.6,22.15 5.6,21.4 7.375,21.4 7.452,21.323 7.452,21.152 6.9,20.6 5.35,20.6
no net on Top Overlay "NONET_L02_P-001" (solid): 5.925,21.15
no net on Top Overlay "NONET_L02_P-001" (solid): 4,12.65 3.825,12.475 3.825,12.15 0.5,12.15 0.525,12.175 0.525,22.575 3.875,22.575 4,22.45 4,22.15 5.35,22.15 5.6,22.4 5.6,25.35 5.5,25.45 5.325,25.45 5.325,24.2 4.25,23.125 0.1,23.125 0.1,9.45 5.525,9.45 5.525,11.025 6.1,11.6 7.6,11.6 7.6,14.456 7.594,14.45 5.35,14.45 5.35,12.65
no net on Top Overlay "NONET_L02_P-001" (solid): 0.1,0.1 0.125,0.125 0.125,5.25 0.35,5.25 1.1,4.5 1.1,2.75 5.377,2.75 5.377,4.127 6.35,5.1 6.95,5.1 6.95,1.475 5.6,0.125
GND on Top Layer "GND_L01_P000" (solid, pour order 0): 0.1,25.65 44.4,25.65 44.4,0.1 0.1,0.1
GND on Bottom Layer "GND_L02_P001" (solid, pour order 1): 0.1,25.65 44.4,25.65 44.4,0.1 0.1,0.1

## Silkscreen, mask and mechanical layers (free items; w line width, h text height)
Top Overlay:
  pour cut-out: 5.475,22.275
  pour cut-out: 5.6,21.4 7.375,21.4 7.375,25.35 5.6,25.35 5.6,22.4 5.575,22.025
  pour cut-out: 5.575,11.8 7.45,11.8 7.475,11.825 7.45,11.85 7.45,14.25 5.625,14.25 5.6,14.225
  pour cut-out: 1.4,9.7 1.425,9.725 5.35,9.725 5.35,11.675 5.325,11.7 5.3,11.675 1.425,11.675
  pour cut-out: 4.639,0.703 5.395,0.703 5.397,0.701 5.397,2.341 4.637,2.341
  pour cut-out: 2.018,0.525 4.432,0.525 4.432,2.348 2.018,2.348
  text "34G" at 7.225,21.525 h2.5 r90
  text "12" at 7.3,11.95 h2.5 r90
  text "Ctrl" at 1.6,9.925 h2.5
  text "+ -" at 5.414,0.8 h1.5 r90
  text "PWR 30V" at 2.017,0.525 h1
Bottom Overlay:
  text "BLDC DRIVER" at 44.225,7.95 h5
  text "github.com/mehmetatay" at 44.35,0.425 h1.5
Mechanical 5:
  the board outline again, w0.2